# Altium PCB SensorPCB.PcbDoc
Units mm, origin at the board's own origin, x right, y up, seen from the top; angles counter-clockwise.
Board outline 10.92 x 9.65 mm, 2 copper layers (Top Layer, Bottom Layer); 10 components, 9 nets, 41 pads, 16 vias.
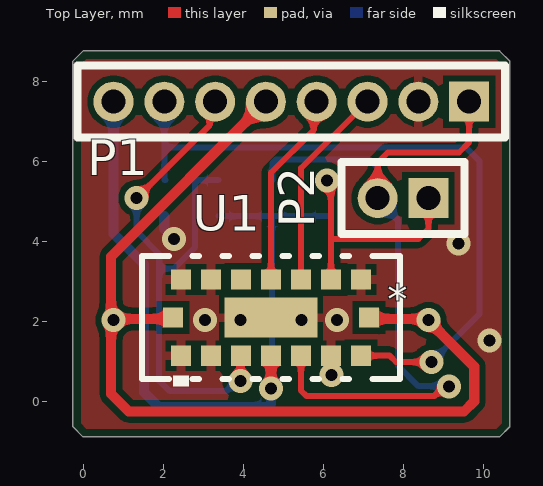
[diagram p0: Top Layer view]
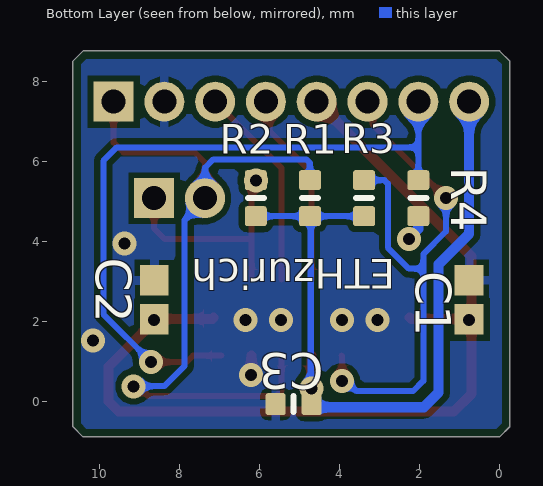
[diagram p1: Bottom Layer view, seen from below]
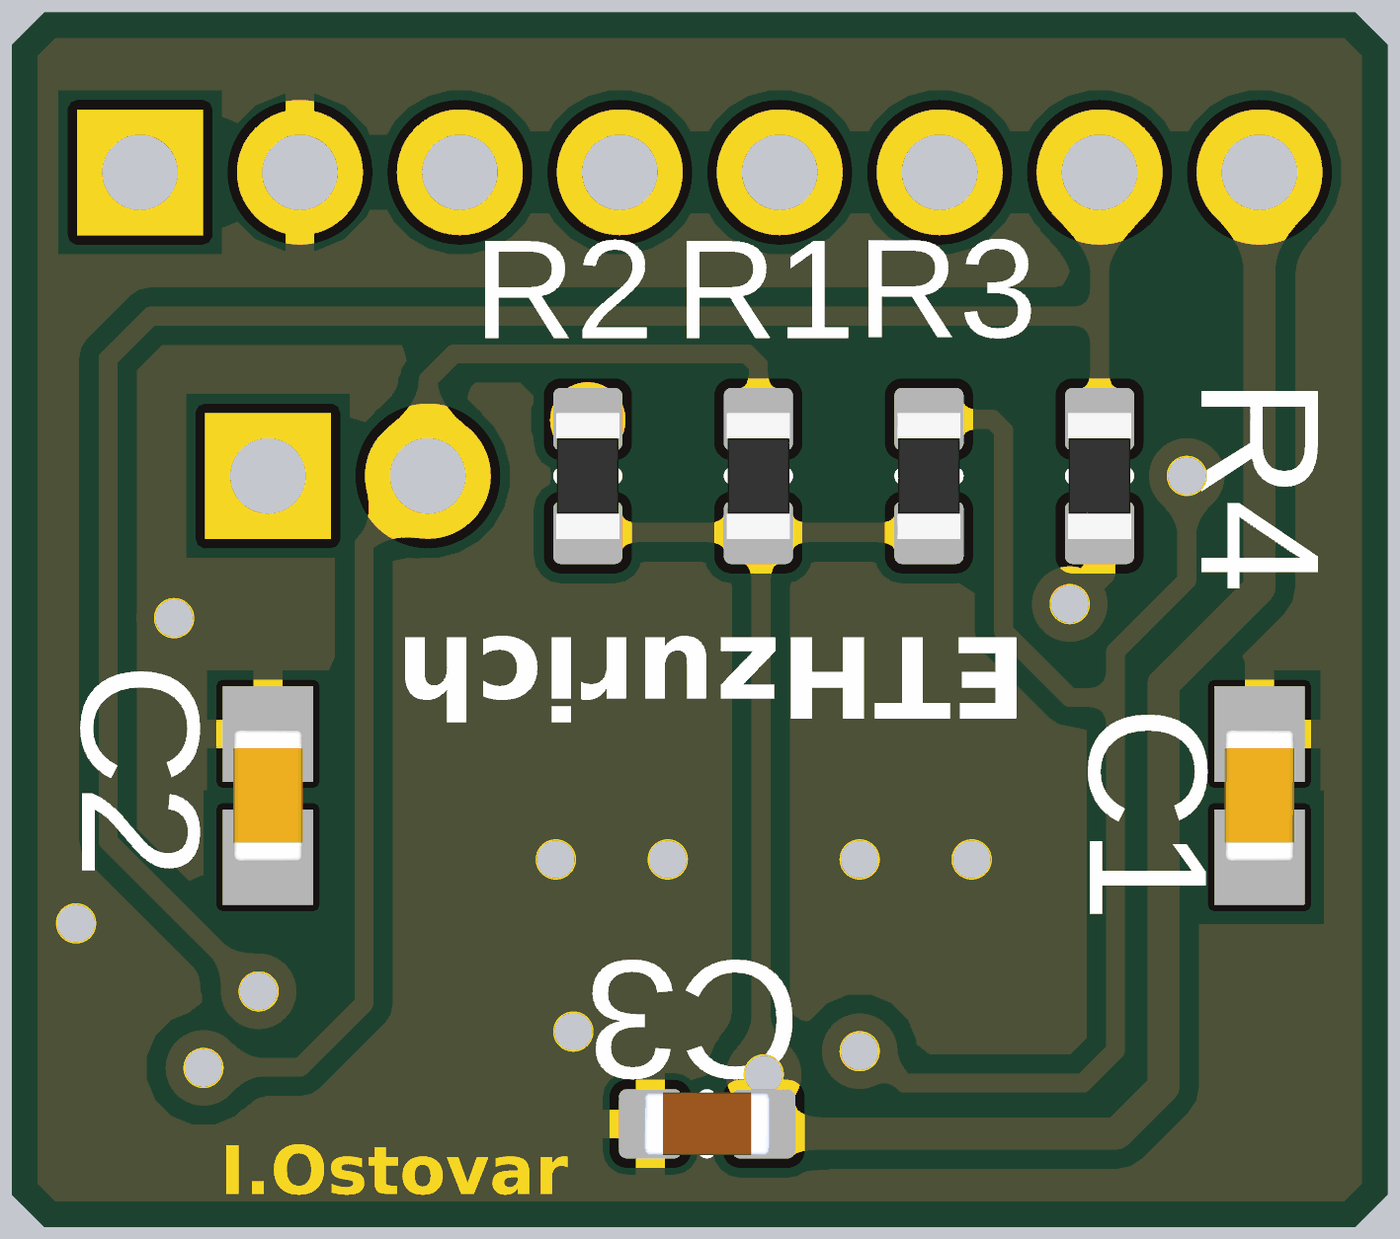
[diagram p2: 3D render of the assembled board from below, using the file's embedded part models]

## Layer stack, top to bottom
Top Solder: solder mask 0.01, Solder Resist, Dk 3.5
Top Layer: signal copper 0.036
Dielectric 1: dielectric 0.32, FR-4, Dk 4.8
Bottom Layer: signal copper 0.036
Bottom Solder: solder mask 0.01, Solder Resist, Dk 3.5

## Board outline
-0.254,-0.635 -0.254,8.509 0,8.763 10.414,8.763 10.668,8.509 10.668,-0.635 10.414,-0.889 0,-0.889

## Design rules (kind name [scope] priority, off if disabled: settings)
AcuteAngle [All] p1: minimum=6.00000000000000E+0001 checktracksonly=TRUE
BoardOutlineClearance [All] p1: gap=0 ignorepadtopadclearanceinfootprint=FALSE except(0.2: Poly-OutlineEdge)
Clearance [All] p1: gap=0.15 ignorepadtopadclearanceinfootprint=FALSE
ComponentClearance ComponentClearance_moreweirdtphole [InComponent('TP27') vs InComponent('U2')] p1: gap=0 collisioncheckmode=3 verticalgap=0 showdistances=FALSE
ComponentClearance ComponentClearance_weird_tp_holes [InComponent('TP25') vs InComponent('TP26')] p2: gap=0 collisioncheckmode=3 verticalgap=0 showdistances=FALSE
ComponentClearance ComponentClearance_TPunderlatch [InComponent('U2') vs InComponent('TP23') or InComponent('JP21') or InComponent('JP27') or InComponent('JP24') or InComponent('JP25') or InComponent('JP26')] p3: gap=0 collisioncheckmode=3 verticalgap=0 showdistances=FALSE
ComponentClearance ComponentClearance_NetTie [InComponentClass('NetTie')] p4: gap=0 collisioncheckmode=3 verticalgap=0 showdistances=TRUE
ComponentClearance ComponentClearance_Hole [InComponentClass('Holes, Screws etc.')] p5: gap=0 collisioncheckmode=3 verticalgap=0 showdistances=TRUE
ComponentClearance [All] p6: gap=0.25 collisioncheckmode=3 verticalgap=0.25 showdistances=TRUE
DiffPairsRouting [All] p1: maxlimit=0.381 minlimit=0.125 mostfreqgap=0.125 toplayer_minwidth=0.125 toplayer_maxwidth=0.381 toplayer_prefwidth=0.3 bottomlayer_minwidth=0.125 bottomlayer_maxwidth=0.381 bottomlayer_prefwidth=0.3 maxuncoupledlength=12.7
FabricationTestpoint [All] p1: side=3 testpointundercomponent=TRUE minsize=0.5 maxsize=2.54 preferedsize=1.524 minholesize=0 maxholesize=1.016 preferedholesize=0.813 testpointgrid=0.025 allowsidetop=TRUE allowsidebottom=TRUE usegrid=TRUE gridtolerance=0
FanoutControl Fanout_BGA_1 [InComponent('U1')] p1: bgadir=Out bgaviamode=Centered fanoutstyle=BGA fanoutdirection=Alternating viagrid=0.025 // Fanout_BGA (Default Rule)
FanoutControl Fanout_BGA [IsBGA] p2: bgadir=Out bgaviamode=Centered fanoutstyle=Auto fanoutdirection=Alternating viagrid=0.025 // Fanout_BGA (Default Rule)
FanoutControl Fanout_LCC [IsLCC] p3: bgadir=Out bgaviamode=Centered fanoutstyle=Auto fanoutdirection=Alternating viagrid=0.025 // Fanout_LCC (Default Rule)
FanoutControl Fanout_SOIC [IsSOIC] p4: bgadir=Out bgaviamode=Centered fanoutstyle=Auto fanoutdirection=Alternating viagrid=0.025 // Fanout_SOIC (Default Rule)
FanoutControl Fanout_Small [(CompPinCount < 5)] p5: bgadir=Out bgaviamode=Centered fanoutstyle=Auto fanoutdirection=OutThenIn viagrid=0.025 // Fanout_Small (Default Rule)
FanoutControl Fanout_Default [All] p6: bgadir=Out bgaviamode=Centered fanoutstyle=Auto fanoutdirection=Alternating viagrid=0.025 // Fanout_Default (Default Rule)
Height [All] p1: minheight=0 maxheight=50 prefheight=12.7
HoleSize [All] p1: absolutevalues=TRUE maxlimit=5 minlimit=0.3 maxpercent=80.000 minpercent=20.000
HoleToHoleClearance [All] p1: gap=0.25 allowstackedmicrovias=FALSE
Length "InNet('CLK_0') Or InNet('CLK_1')" [InNet('CLK_0') Or InNet('CLK_1')] p1: maxlimit=36.773 minlimit=0
MinimumAnnularRing MinimumAnnularRing_Vias_bga [Isvia and TouchesRoom('GAP')] p1: minimumring=0.1
MinimumAnnularRing MinimumAnnularRing_Vias [Isvia] p2: minimumring=0.124
MinimumAnnularRing [All] p3: minimumring=0.15
MinimumSolderMaskSliver [All] p1: minsoldermaskwidth=0.1
PlaneClearance "Mounting Holes" [InPadClass('ExtendedClearance')] p1: clearance=2.1
PlaneClearance [All] p2: clearance=0.2
PlaneConnect [All] p1: planeconnectstyle=Direct reliefexpansion=0.508 reliefentries=4 reliefconductorwidth=0.254 reliefairgap=0.254
PolygonConnect [All] p1: thpad.connectstyle=Relief thpad.reliefconductorwidth=0.229 thpad.reliefentries=4 thpad.polygonreliefangle="90 Angle" thpad.airgapwidth=0.125 smdpad.connectstyle=Relief smdpad.reliefconductorwidth=0.229 smdpad.reliefentries=4 smdpad.polygonreliefangle="90 Angle" smdpad.airgapwidth=0.125 via.connectstyle=Direct via.reliefconductorwidth=0.229 via.reliefentries=4 via.polygonreliefangle="90 Angle" via.airgapwidth=0.125
RoutingVias [All] p1: holewidth=0.3 width=0.6 viastyle="Through Hole" minholewidth=0.3 minwidth=0.6 maxholewidth=0.3 maxwidth=0.6
ShortCircuit ShortCircuit_variant_footprint [IsPad and not InAnyNet vs IsPad and not InAnyNet] p1: allowed=TRUE
ShortCircuit [All] p2: allowed=FALSE
SilkToSilkClearance "SilkText Exception" [OnSilkscreen  And (IsText And Not IsDesignator) vs OnSilkscreen  And ((IsText And Not IsDesignator) or IsTrack)] p1: silktosilkclearance=0
SilkToSilkClearance [All] p2: silktosilkclearance=0.01
SilkToSolderMaskClearance [IsPad] p1: minsilkscreentomaskgap=0.01 clearancetoexposedcopper=TRUE
SolderMaskExpansion [All] p1: expansion=0.075 istentingtop=FALSE
Width [All] p1: maxlimit=0.6 minlimit=0.15 preferedwidth=0.15 minimp=50.000000 maximp=50.000000 favimp=50.000000
13 further rules are at their usual default settings.

## Components (designator, comment, footprint, x,y, rotation, side; value= is the part's Value field where it differs from the comment)
C1 "Capacitor 1 uF +/- 10% 6.3 V 1005" CAPC1005X55X25ML5T10 0.762,2.54 r270 bottom value=4.7µF
C2 "Capacitor 1 uF +/- 10% 6.3 V 1005" CAPC1005X55X25ML5T10 8.636,2.54 r270 bottom value=4.7µF
C3 "Capacitor 100nF +/-20% 25V 0402" CAPC0402(1005)60_L 5.149,-0.069 r180 bottom value=100nF
P1 "Sensor" MHDR1X8 9.652,7.493 r180 top locked
P2 "Extra IOs" MHDR1X2 8.636,5.08 r180 top locked
R1 "Resistor 47K5 +/-1 % 0402 63 mW" RESC0402(1005)_L#1 4.741,5.08 r270 bottom value=47k
R2 "Resistor 47K5 +/-1 % 0402 63 mW" RESC0402(1005)_L#1 6.096,5.08 r270 bottom value=47k
R3 "Resistor 47K5 +/-1 % 0402 63 mW" RESC0402(1005)_L#2 3.387,5.08 r270 bottom value=47k
R4 "Resistor 47K5 +/-1 % 0402 63 mW" RESC0402(1005)_L#1 2.032,5.08 r90 bottom value=47k
U1 "VL53L5 Forward" ARRAY_53L5_STM 4.699,2.095 r180 top locked

## Footprints (in the part's own frame and the unit in brackets; to place one, negate y for a bottom-side part, rotate by r counter-clockwise, add the part's x,y. Pads: shape width x height; smd on the part's side, far side on the other; paste and mask are expansions set on the pad)
ARRAY_53L5_STM [mil]
  rect 20x20 smd paste+0 mask+0: A1(-88.58,37.5) A2(-59.06,37.5) A3(-29.53,37.5) A4(0,37.5) A5(29.53,37.5) A6(59.06,37.5) A7(88.58,37.5) B1(-96.5,0) B7(96.5,0) C1(-88.58,-37.5) C2(-59.06,-37.5) C3(-29.53,-37.5) C4(0,-37.5) C5(29.53,-37.5) C6(59.06,-37.5) C7(88.58,-37.5)
  rect 92x39.37 smd paste-45.5 mask+0: B4(0,0)
  silkscreen extent -127,-61 127,68, body extent -125,-60 125,60, height 10
CAPC0402(1005)60_L [mm] "Chip Capacitor, Body 1.0x0.5mm, Height 0.6mm, IPC High Density"
  rrect25% 0.5x0.55 smd: 1(-0.45,0) 2(0.45,0)
  silkscreen extent 0,-0.2 0,0.2, body extent -0.5,-0.25 0.5,0.25, height 0.6
CAPC1005X55X25ML5T10 [mm] "Chip Capacitor, 2-Leads, Body 1.05x0.55mm, IPC Low Density"
  rect 0.76x0.72 smd mask+0.05: 1(-0.49,0) 2(0.49,0)
  body extent -0.53,-0.28 0.53,0.28, height 0.55
MHDR1X2 [mm] "Connector; Header; 2 Position"
  rect 1x1 hole 0.6: 1(0,0)
  round 1 hole 0.6: 2(1.27,0)
  silkscreen extent -0.9,-0.9 2.17,0.9
MHDR1X8 [mm] "Connector; Header; 8 Position"
  rect 1x1 hole 0.6: 1(0,0)
  round 1 hole 0.6: 2(1.27,0) 3(2.54,0) 4(3.81,0) 5(5.08,0) 6(6.35,0) 7(7.62,0) 8(8.89,0)
  silkscreen extent -0.9,-0.9 9.79,0.9
RESC0402(1005)_L#1 [mm] "Chip Resistor, Body 1.0x0.5mm, IPC High Density"
  rrect25% 0.5x0.55 smd: 1(-0.45,0) 2(0.45,0)
  silkscreen extent 0,-0.2 0,0.2, body extent -0.5,-0.25 0.5,0.25, height 0.3
RESC0402(1005)_L#2 [mm] "Chip Resistor, Body 1.0x0.5mm, IPC High Density"
  rrect25% 0.5x0.55 smd: 2(0.45,0) ""(-0.45,0)
  silkscreen extent 0,-0.2 0,0.2, body extent -0.5,-0.25 0.5,0.25, height 0.3

## Part data
C1 C2: library part CMP-001-00009-6, "Chip Capacitor, 1 uF, +/- 10%, 6.3 V, 1005 (0402 Metric)", Capacitor Type=Ceramic, Case/Package=0402, Max Operating Temperature=85°C, Min Operating Temperature=-55°C, Tolerance=10%, Voltage Rating=6.3V, Mounting Technology=SM, Pins=2, RoHS Compliant=True
C3: library part CMP-001-00065-4, "Chip Capacitor, 100nF +/-20%, 25V, 0402, Thickness 0.6 mm", Case/Package=0402, Max Operating Temperature=85°C, Min Operating Temperature=-55°C, Tolerance=10%, Voltage Rating=25V, Mounting Technology=SMT, Pins=2
P1: library part MHDR1X8, "Header, 8-Pin", LatestRevisionDate=17-Jul-2002, LatestRevisionNote="Re-released for DXP Platform.", Publisher="Altium Limited", system=Connector
P2: library part MHDR1X2, "Header, 2-Pin", LatestRevisionDate=17-Jul-2002, LatestRevisionNote="Re-released for DXP Platform.", Publisher="Altium Limited"
R1 R2 R3 R4: library part CMP-009-00137-3, "Chip Resistor, 47,5 kOhms, +/-1 %, 63 mW, -55 to 155 degC, 0402", Case/Package=0402, Max Operating Temperature=155°C, Min Operating Temperature=-55°C, Power=63mW, Tolerance=1%, Pins=2
U1: library part VL53L5, "No Description Available", Built_By=EMA_Matt, Copyright="Copyright (C) 2018 Accelerated Designs. All rights reserved", Datasheet=https://www.st.com/resource/en/data_brief/vl53l5.pdf, Manufacturer_Part_Number=VL53L5, RefDes=RefDes, SourceLibrary=Update_to_database_2021-02-23, Type=DEV, Vendor=STMicroelectronics

## Via types
v1: diameter 0.6, hole 0.3, Top Layer to Bottom Layer, tented both sides, 16 vias

## Nets (pads, with @x,y where several pads share a name; then routed paths per layer and width w, separated by ;. In a path a pad name is that pad's centre, name@x,y a point inside that pad or via, vN(x,y) a via of type N, cw(c..) or ccw(c..) an arc to the next point about the centre after c; other vN are vias at no path point)
AVDD: C1.2 C2.2 P1.5 U1.B1 U1.B7 | length 23.9
  Top Layer w0.254: U1.B7 2.216,2.064 0.794,2.064 v1(0.762,2.032) ; P1.5 0.699,3.619 0.699,2.095 v1(0.762,2.032) ; U1.B1 7.182,2.064 8.604,2.064 8.604,2.043 9.779,0.869 9.779,0 9.525,-0.254 1.143,-0.254 0.699,0.191 0.699,1.968 v1(0.762,2.032)
  Bottom Layer w0.254: C2.2 C2.2@8.645,2.041
  other v1: 8.636,2.032
GND: C1.1 C2.1 C3.1 P1.2 R4.1 U1.A2 U1.A6 U1.A7 U1.B4 U1.C1 U1.C6 U1.C7 | length 1.2
  Top Layer w0.254: U1.A2 6.205,1.137 6.205,0.67 v1(6.211,0.664)
  Bottom Layer w0.254: R4.1 2.032,4.318 2.269,4.081 v1(2.269,4.061)
  other v1: 10.16,1.524 3.048,2.032 3.937,2.032 5.461,2.032 6.35,2.032 9.381,3.95
GPIO1(INT): P1.1 P2.2 R1.1 U1.A3 | length 19
  Top Layer w0.15: U1.A3 5.449,0.271 5.581,0.139 8.79,0.139 9.026,0.375 v1(9.148,0.375) ; P2.2 7.366,5.969 7.62,6.223 9.398,6.223 9.652,6.477 P1.1
  Bottom Layer w0.15: R1.1 4.741,5.962 4.829,6.05 7.158,6.05 7.364,5.844 7.364,5.047 7.874,4.537 7.874,0.889 8.382,0.381 9.142,0.381 v1(9.148,0.375)
GPIO2(RSVD6): P2.1 R2.1 U1.C2 | length 5.8
  Top Layer w0.15: v1(6.096,5.525) 6.199,5.422 6.199,4.925 6.199,4.064 6.223,4.064 ; U1.C2 6.199,4.04 6.223,4.064 ; P2.1 8.636,4.318 8.382,4.064 6.223,4.064
I2C_RST: P1.7 R4.2 U1.A1 | length 17.4
  Top Layer w0.15: U1.A1 7.666,1.143 7.825,0.984 v1(8.71,0.984)
  Bottom Layer w0.15: P1.7 2.032,6.35 ; R4.2@2.057,5.53 R4.2 2.032,6.35 ; v1(8.71,0.984) 9.906,2.18 9.906,6.012 9.568,6.35 2.032,6.35
IOVDD: C3.2 P1.8 R1.2 R2.2 R3.2 U1.A4 | length 19.2
  Top Layer w0.254: v1(4.699,0.323) U1.A4
  Bottom Layer w0.152: R3.2 R1.2 ; v1(4.699,0.323) 4.72,0.344 4.72,4.609 R1.2 ; R2.2 R1.2
  Bottom Layer w0.254: P1.8 0.762,4.191 1.524,3.429 1.524,0.227 1.897,-0.146 4.622,-0.146 C3.2 v1(4.699,0.323)
LPn: P1.6 R3. U1.A5 | length 14.1
  Top Layer w0.15: v1(1.339,5.08) 3.164,6.905 3.164,7.355 P1.6 ; v1(3.937,0.508) 3.937,1.131 U1.A5
  Bottom Layer w0.15: v1(1.339,5.08) 1.339,4.249 1.905,3.683 1.905,3.319 ; R3. 2.882,5.53 2.794,5.442 2.794,3.844 2.269,3.319 1.905,3.319 ; v1@3.761,0.435 3.58,0.254 2.165,0.254 1.905,0.514 1.905,3.319 ; v1@3.885,0.456 v1(3.937,0.508)
SCL: P1.4 U1.C4 | length 4.9
  Top Layer w0.152: U1.C4 4.699,5.715 5.765,6.781 5.765,7.416 P1.4
SDA: P1.3 U1.C3 | length 5.1
  Top Layer w0.152: U1.C3 5.449,5.83 P1.3
pads on no net: U1.C5

## Polygon pours and split planes (outlines as drawn)
GND on Bottom Layer "GND_L02_P001" (solid, remove dead copper, pour order 1): 10.414,8.763 10.668,8.509 10.668,-0.635 10.414,-0.889 0,-0.889 -0.254,-0.635 -0.254,8.509 0,8.763
GND on Top Layer "GND_L01_P002" (solid, remove dead copper, pour order 2): 0,8.763 -0.254,8.509 -0.254,-0.635 0,-0.889 10.414,-0.889 10.668,-0.635 10.668,8.509 10.414,8.763

## Silkscreen, mask and mechanical layers (free items; w line width, h text height)
Bottom Overlay:
  text "ETHzurich" at 2.609,3.798 h1.27 r180
Bottom Solder:
  text "I.Ostovar" at 9.017,-0.627 h0.76
Mechanical 4:
  the board outline again, w0

## Text inside footprints (layer, text, board x,y; h text height)
U1: Top Overlay "*" at 8.115,3.481 h1.27 r180; Top 3D Body "*" at 7.214,2.355 h1.27 r180